# Altium PCB MJE13001_SWITCHING_WITH_FEEDBACK.PcbDoc
Units mil, origin at the board's own origin, x right, y up, seen from the top; angles counter-clockwise.
Board outline 2025 x 1100 mil, 2 copper layers (Top Layer, Bottom Layer); 19 components, 13 nets, 43 pads, 0 vias.
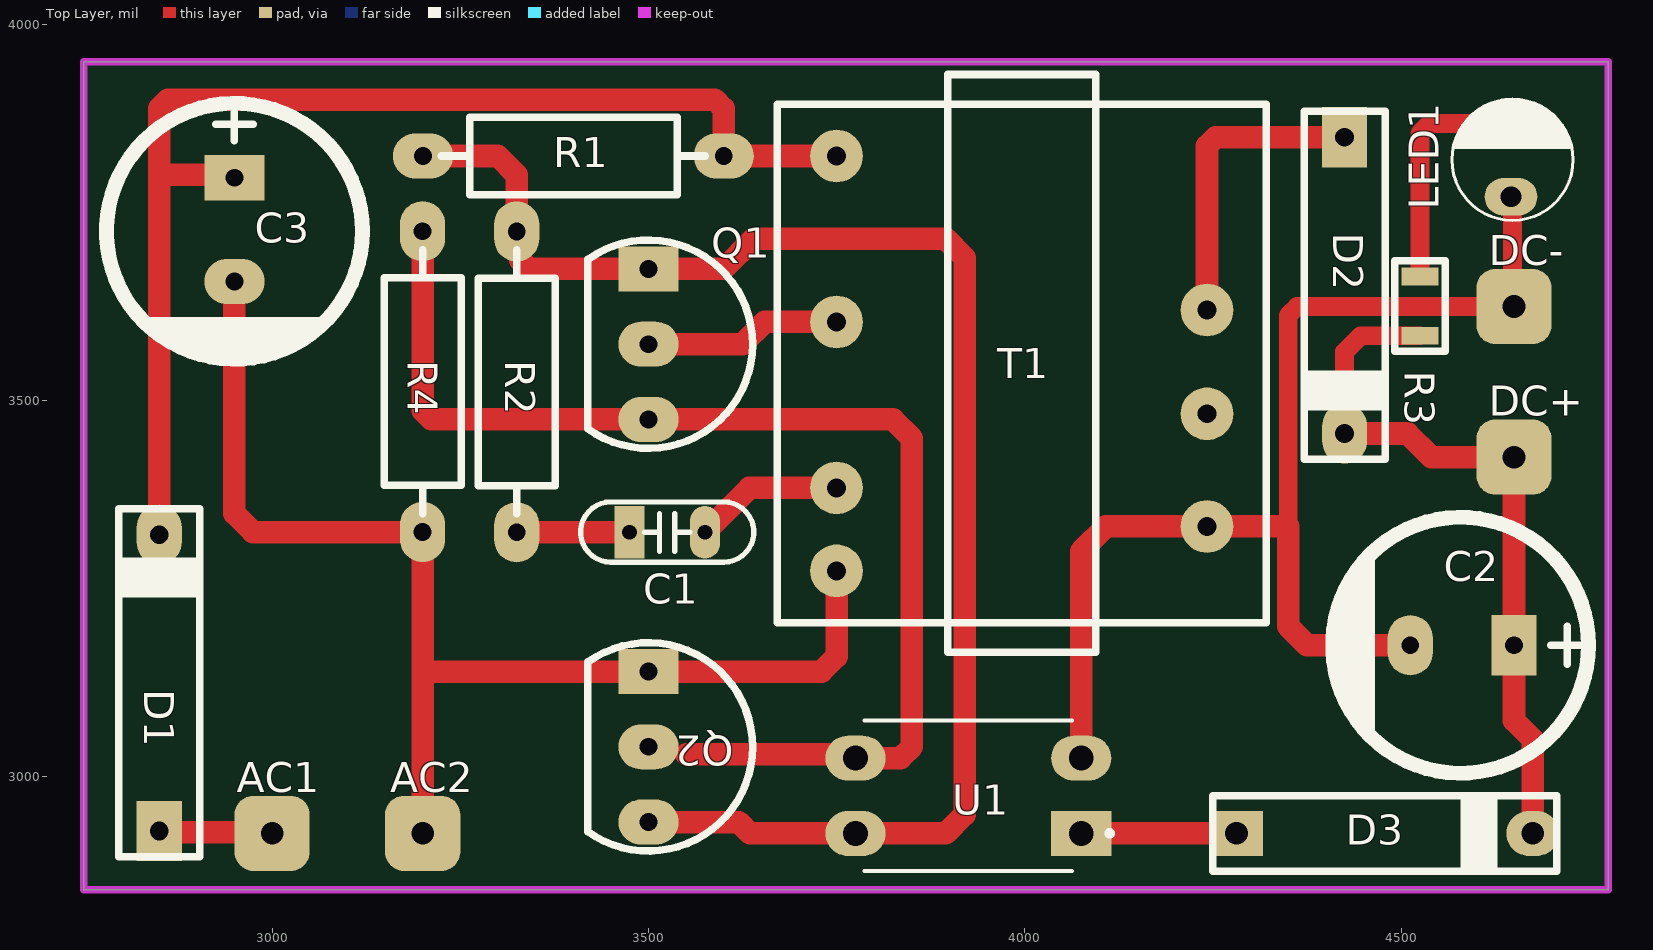
[diagram p0: Top Layer view]
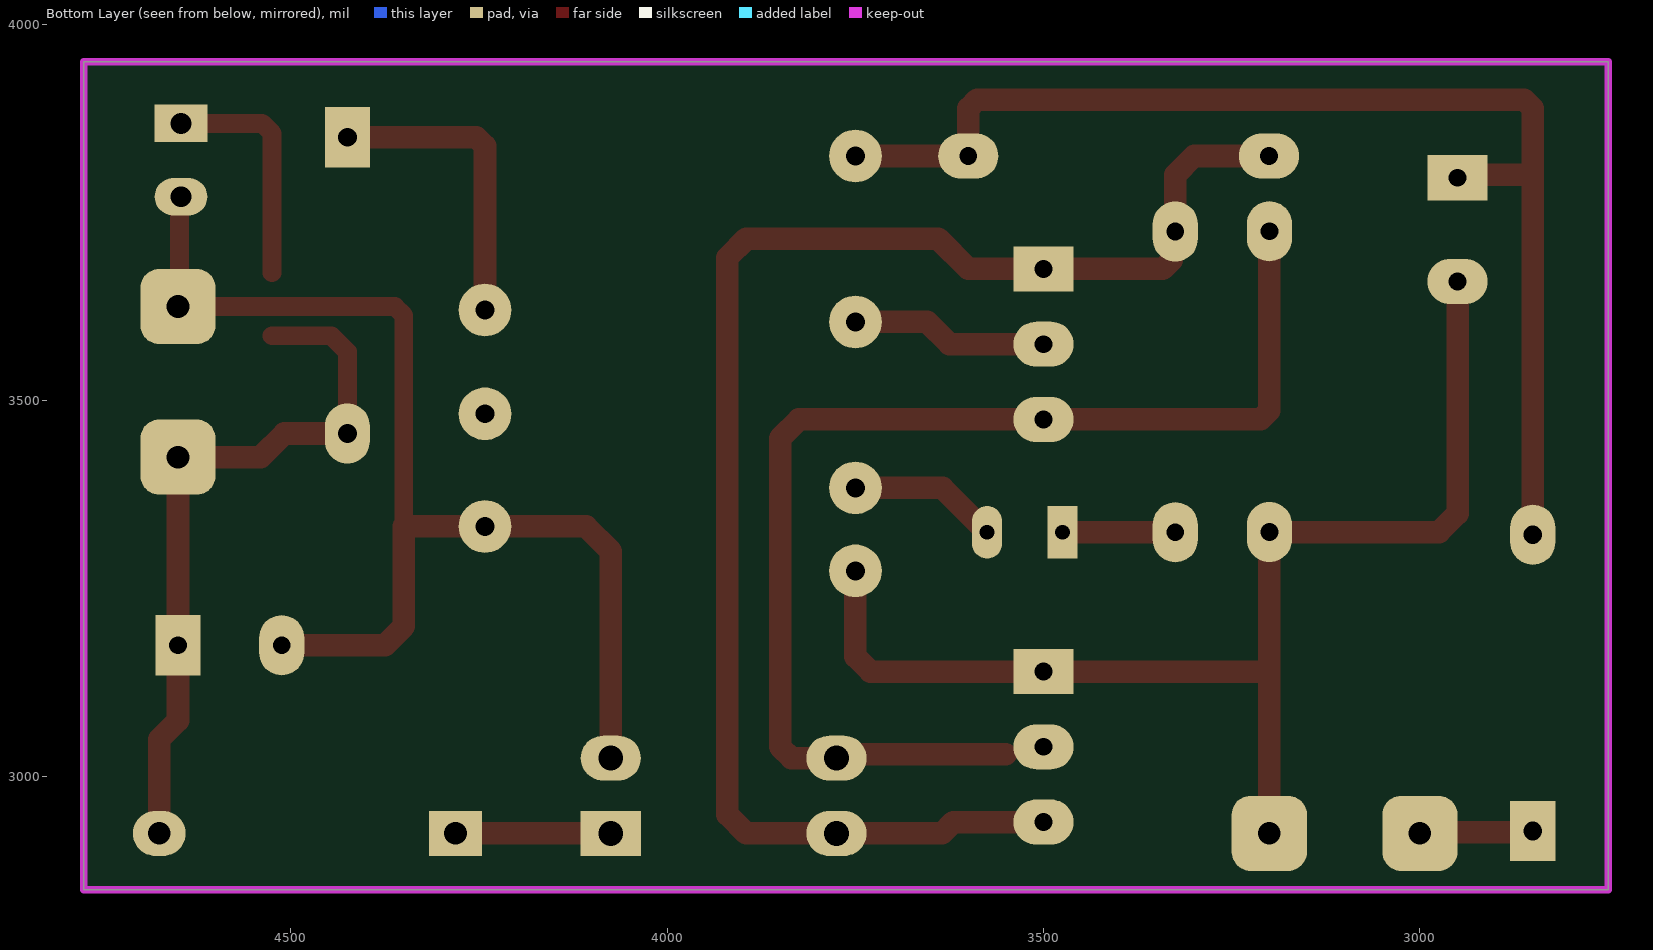
[diagram p1: Bottom Layer view, seen from below]
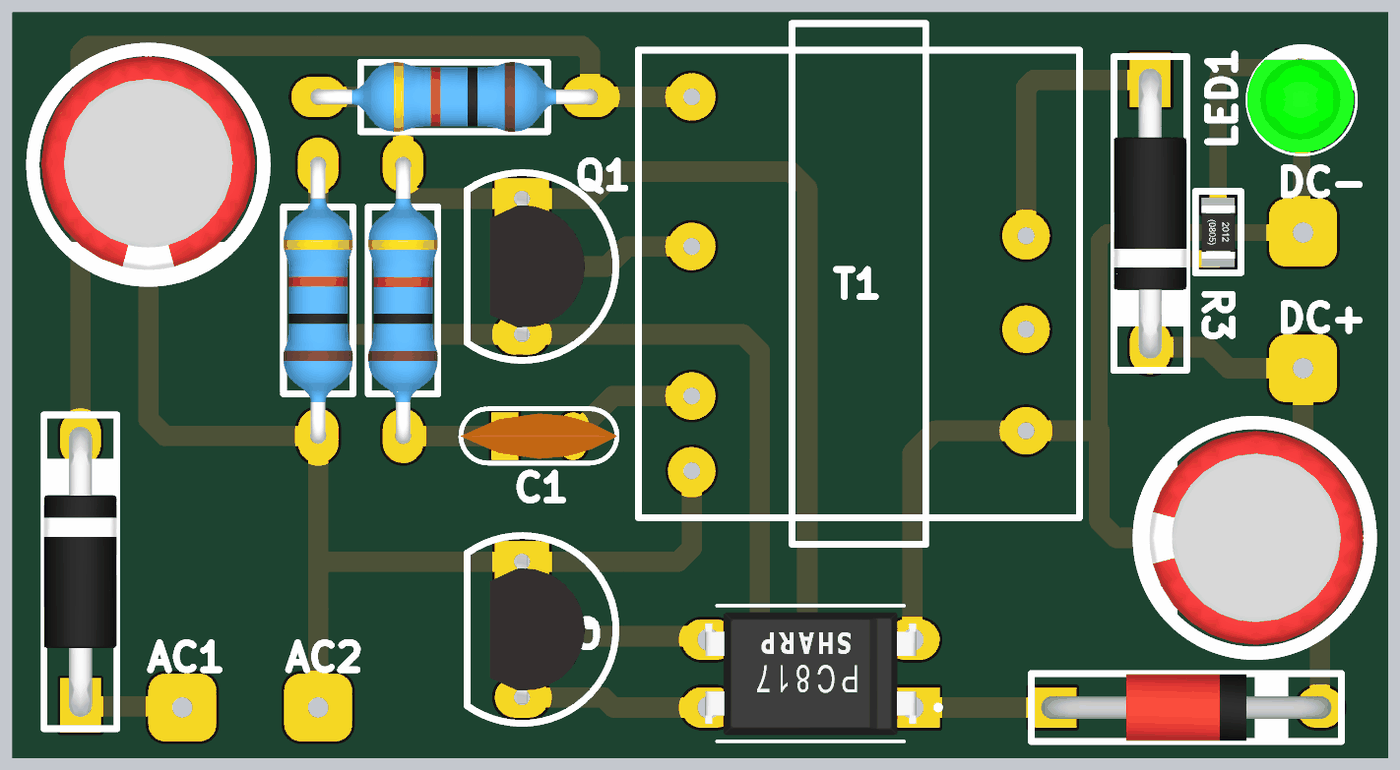
[diagram p2: 3D render of the assembled board from above, using the file's embedded part models]

## Layer stack, top to bottom
Top Solder: solder mask 0.4, Solder Resist, Dk 3.5
Top Layer: signal copper 1.4
Dielectric 1: dielectric 12.6, FR-4, Dk 4.8
Bottom Layer: signal copper 1.4
Bottom Solder: solder mask 0.4, Solder Resist, Dk 3.5

## Board outline
2750,2850 4775,2850 4775,3950 2750,3950

## Design rules (kind name [scope] priority, off if disabled: settings)
Clearance [All] p1: gap=10 ignorepadtopadclearanceinfootprint=FALSE except(0: Arc-Hole Track-Hole SMDPad-Hole THPad-Hole Via-Hole Fill-Hole Poly-Hole Region-Hole Text-Hole)
PolygonConnect [All] p1: connectstyle=Relief reliefconductorwidth=10 reliefentries=4 polygonreliefangle="90 Angle" airgapwidth=10
RoutingVias [All] p1: holewidth=28 width=50 viastyle="Through Hole" minholewidth=28 minwidth=50 maxholewidth=28 maxwidth=50
SolderMaskExpansion [All] p1: expansion=4 istentingtop=FALSE
Width [All] p1: maxlimit=40 minlimit=10 preferedwidth=20
30 further rules are at their usual default settings.

## Classes and differential pairs
component class MJE13001_SWITCHING_WITH_FEEDBACK: AC1 AC2 C1 C2 C3 D1 D2 D3 DC+ DC- Q1 Q2 R1 R2 R3 R4 T1 U1

## Components (designator, comment, footprint, x,y, rotation, side; value= is the part's Value field where it differs from the comment)
AC1 "SolderPoint" SolderPoint 3000,2925 r180 top
AC2 "SolderPoint" SolderPoint 3200,2925 r0 top
C1 "472" CAP_DISC_PITCH_2.54MM 3525,3325 r0 top
C2 "1000uF/10V" CAP_RAD_7mm 4578.94,3175 r180 top
C3 "4.7uF/400V" CAP_RAD_7mm 2950,3725 r270 top
D1 "1N4007" DO-41 2850,3125 r90 top
D2 "1N5819" DO-41 4425,3653.15 r270 top
D3 "5V1" "DO-35 Horizontal" 4478.15,2925 r0 top
DC+ "SolderPoint" SolderPoint 4650,3425 r0 top
DC- "SolderPoint" SolderPoint 4650,3625 r270 top
LED1 "3mm" "LED 3mm Green" 4650,3825 r180 top
Q1 "MJE13001" TO-92 3500,3575 r270 top
Q2 "S9014" TO-92 3500,3040 r270 top
R1 "2M2" RES-0.25W-H-MF 3400.2,3825 r180 top
R2 "1K" RES-0.25W-H-MF 3325,3525 r90 top
R3 "220" R0805 4525,3586.26 r270 top
R4 "20R" RES-0.25W-H-MF 3200.01,3525.2 r90 top
T1 "Trans-EE19A-2.1" TRANS_EE19A-2.1 3996.06,3549.41 r90 top
U1 "PC817" DIP4 3925,2975 r180 top

## Footprints (in the part's own frame and the unit in brackets; to place one, negate y for a bottom-side part, rotate by r counter-clockwise, add the part's x,y. Pads: shape width x height; smd on the part's side, far side on the other; paste and mask are expansions set on the pad)
CAP_DISC_PITCH_2.54MM [mil]
  rect 40x70 hole 19.68: 1(-50,0)
  oval 40x70 hole 19.68: 2(50,0)
  silkscreen extent -115,-40 115,40, body extent -115,-33 115,33, height 235
CAP_RAD_7mm [mil]
  rect 60x80 hole 23.62: 1(-71.06,0)
  oval 60x80 hole 23.62: 2(66.73,0)
  silkscreen extent -170,-170 170,170, body extent -160,-157 155,157, height 446
DIP4 [mil]
  rect 80x60 hole 33.07: 1(-150,50)
  oval 80x60 hole 33.07: 2(-150,-50) 3(150,-50) 4(150,50)
  silkscreen extent -191,-100 138,100, body extent -155,-90 155,90, height 169
"DO-35 Horizontal" [mil]
  rect 70x60 hole 30: 1(-196.85,0)
  oval 70x60 hole 30: 2(196.85,0)
  silkscreen extent -228,-50 228,50, body extent -214,-49 214,49, height 138
DO-41 [mil]
  rect 80x60 hole 25: 1(-196.85,0)
  oval 80x60 hole 25: 2(196.85,0)
  silkscreen extent -231,-54 231,54, body extent -214,-54 214,54, height 132
"LED 3mm Green" [mm]
  rect 1.778x1.27 hole 0.7: 1(0.1,-1.1)
  oval 1.778x1.27 hole 0.7: 2(0.1,1.375)
  silkscreen extent -2,-1.92 2.1,2.17, body extent -1.89,-1.4 2.09,2.08, height 5.2
R0805 [mm]
  rect 0.6x1.24 smd: 1(-2,0) 2(0,0)
  silkscreen extent -2.52,-0.85 0.53,0.85, body extent -2,-0.63 0,0.62, height 0.45
RES-0.25W-H-MF [mil]
  oval 80x60 hole 23.62: 1(-199.8,0) 2(199.8,0.01)
  silkscreen extent -175,-51 175,51, body extent -211,-51 211,51, height 106
SolderPoint [mil]
  rrect50% 100x100 hole 30: 1(0,0)
TO-92 [mil]
  rect 60x80 hole 23.62: 1(-100,0)
  oval 60x80 hole 23.62: 2(0,0) 3(100,0)
  silkscreen extent -138,-81 138,138, body extent -109,-48 109,93, height 298
TRANS_EE19A-2.1 [mil]
  round 70 hole 25: 1(-275.59,246.06) 2(-165.35,246.06) 4(55.12,246.06) 6(275.59,246.06) 7(70.87,-246.06) 8(-66.93,-246.06) 9(-216.54,-246.06)
  silkscreen extent -384,-325 384,325

## Part data
C1: library part Capacitors(Disc)
C2 C3: library part Capacitor(Radian)
D2: library part 1N4007
D3: library part "Diode Zener"
LED1: library part "LED 3mm"
Q1: library part MJE13001_Type_F
R1 R2 R4: library part "Resistors THD"
R3: library part "Resistor SMD"

## Nets (pads, with @x,y where several pads share a name; then routed paths per layer and width w, separated by ;. In a path a pad name is that pad's centre, name@x,y a point inside that pad or via, vN(x,y) a via of type N, cw(c..) or ccw(c..) an arc to the next point about the centre after c; other vN are vias at no path point)
NetAC1_1: AC1.1 D1.1 | length 151.3
  Top Layer w30: D1.1 2851.57,2926.57 2998.43,2926.57 AC1.1
NetAC2_1: AC2.1 C3.2 Q2.1 R4.1 T1.1 | length 1641.2
  Top Layer w30: C3.2 2950,3350 2974.61,3325.39 R4.1 3200,3140 ; AC2.1 3200,3125.2 ; 3200.2,3125 3200,3125.2 ; T1.1 3750,3160 3730,3140 3200,3140 ; 3200,3125.2 3200,3140
NetC1_1: C1.1 R2.1 | length 150.1
  Top Layer w30: R2.1 3325.1,3325.1 3474.9,3325.1 C1.1
NetC1_2: C1.2 T1.2 | length 199.5
  Top Layer w30: C1.2 3634.06,3384.06 T1.2
NetC2_1: C2.1 D2.2 D3.2 DC+.1 R3.2 | length 965.8
  Top Layer w25: D2.2 4425,3565 4446.26,3586.26 R3.2
  Top Layer w30: D2.2 4508.7,3456.3 4540,3425 DC+.1 C2.1 4650,3075 4675,3050 D3.2
NetC2_2: C2.2 DC-.1 LED1.2 T1.9 U1.2 | length 1601.8
  Top Layer w25: 4350,3332.87 4350,3613.28 4361.72,3625 DC-.1 ; DC-.1@4648.03,3626.97 LED1.2@4648.03,3768.9
  Top Layer w30: U1.2 4075,3300 4107.87,3332.87 T1.9 4350,3332.87 4350,3200 4375,3175 C2.2 ; LED1.2 LED1.2@4648.03,3768.9 ; DC-.1@4648.03,3626.97 DC-.1
NetC3_1: C3.1 D1.2 R1.1 T1.6 | length 1631.1
  Top Layer w30: D1.2 2850,3750 2850,3888.28 2861.72,3900 3588.28,3900 3600,3888.28 R1.1 T1.6 ; 2860,3800 2946.06,3800 C3.1
NetD2_1: D2.1 T1.7 | length 405.7
  Top Layer w30: T1.7 4242.13,3838.28 4253.84,3850 D2.1
NetD3_1: D3.1 U1.1 | length 206.3
  Top Layer w30: U1.1 D3.1
NetLED1_1: LED1.1 R3.1 | length 311.6
  Top Layer w25: R3.1@4525,3670 4525,3855 4538.31,3868.31 LED1.1
NetQ1_1: Q1.1 Q2.3 R1.2 R2.2 U1.4 | length 2048.8
  Top Layer w30: R1.2 3300.01,3824.99 3325,3800 R2.2 3329.69,3720.11 3329.69,3686.72 3341.4,3675 Q1.1 3600,3675 3640,3715 3895,3715 3920,3690 3920,2950 3895,2925 3635,2925 3620,2940 Q2.3
NetQ1_2: Q1.2 T1.4 | length 262.2
  Top Layer w30: Q1.2 3625,3575 3654.53,3604.53 T1.4
NetQ1_3: Q1.3 Q2.2 R4.2 U1.3 | length 1621.8
  Top Layer w30: R4.2 3200,3486.72 3211.72,3475 Q1.3 3825,3475 3850,3450 3850,3040 3835,3025 U1.3 3770,3030 3550,3030
pads on no net: T1.8

## Keep-outs
Keep-Out Layer:
  the board outline again, w10